# EAGLE board BRAIN2_Breakout_SW (EAGLE 6.6.0)
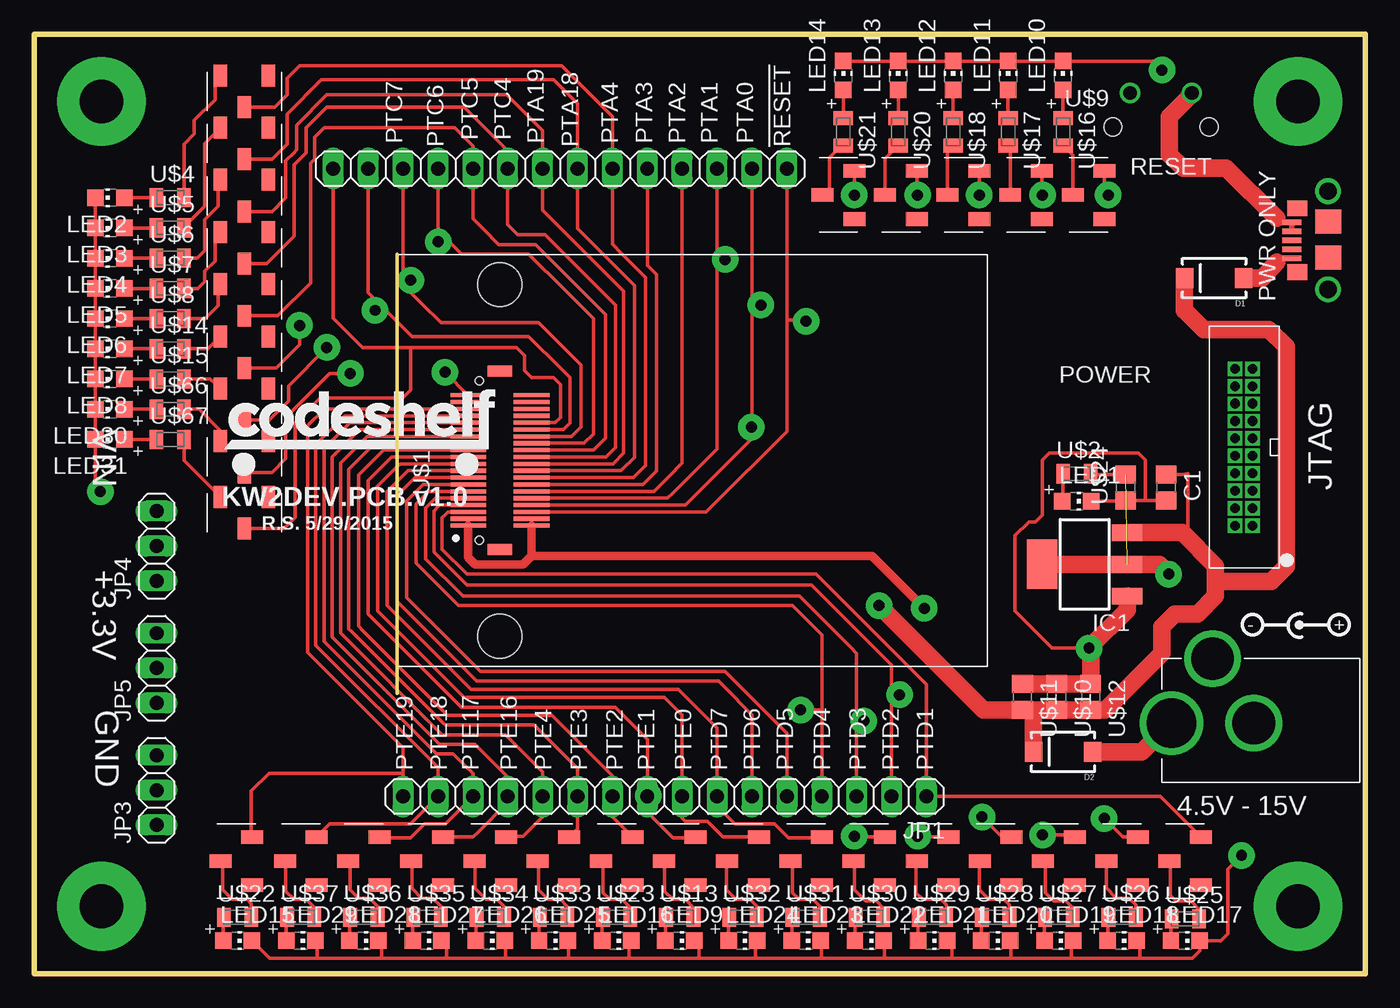
[diagram p0: board, top side]
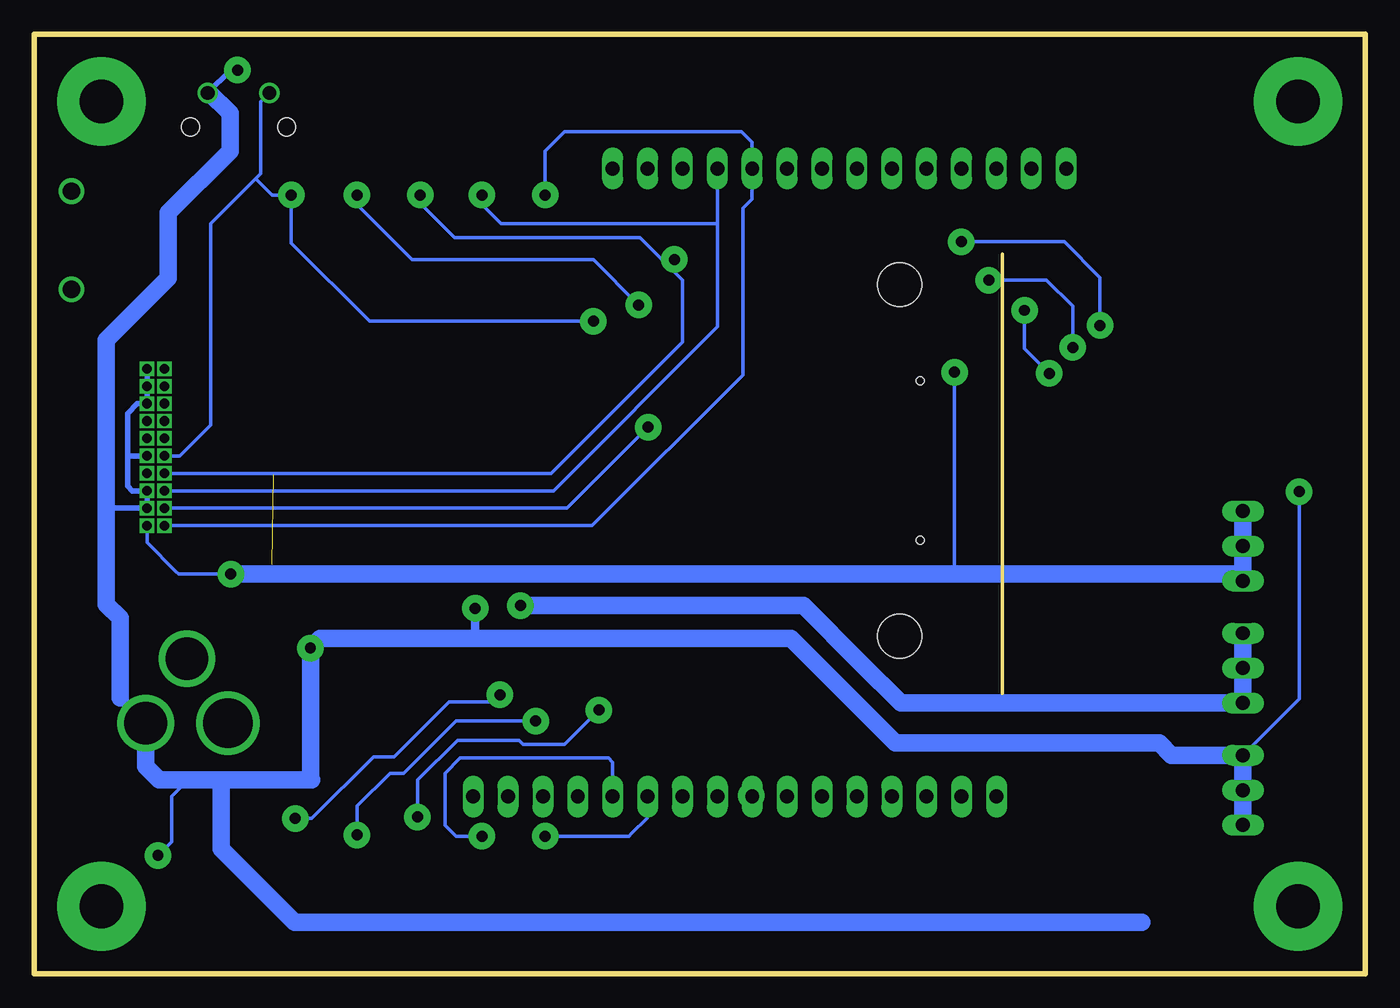
[diagram p1: board, bottom side, seen from below]

Size 96.9 x 68.4 mm. Coordinates in mm from the lower left corner, seen from the top.
Outline: 0,68.4 96.9,68.4 96.9,0 0,0 0,68.4
Copper layers (1*16): Top 0.035mm / dielectric 1.5mm / Bottom 0.035mm
Design rules "default *": minimum track width 10mil, minimum drill 0.8mm, track to track 0.25mm, track to pad 0.25mm, pad to pad 0.25mm, via to via 0.25mm, smd to smd 0.25mm, copper to edge 0.1mm, drill to drill 0.1mm, minimum pad ring 0.1mm, minimum via ring 0.55mm, stop-mask expansion 4mil, vias tented up to drill 0.8mm, thermal gap 10mil

## Footprints (pad centres in the part's own frame; a part is rotated, then mirrored left to right if it is on the bottom)
C0805 = smd 1.3 x 1.5: 1 -0.95,0; 2 0.95,0
SMA-DIODE = smd 1.27 x 1.47: A -2.15,0; C 2.15,0
SOT223 = smd 1.219 x 2.235: 1 -2.311,-3.099; 2 0,-3.099; 3 2.311,-3.099 | smd 3.6 x 2.2: 4 0,3.099
LQFP64 = smd 0.2 x 1: 1 -3.75,-5.75; 2 -3.25,-5.75; 3 -2.75,-5.75; 4 -2.25,-5.75; 5 -1.75,-5.75; 6 -1.25,-5.75; 7 -0.75,-5.75; 8 -0.25,-5.75; 9 0.25,-5.75; 10 0.75,-5.75; 11 1.25,-5.75; 12 1.75,-5.75; 13 2.25,-5.75; 14 2.75,-5.75; 15 3.25,-5.75; 16 3.75,-5.75; 33 3.75,5.75; 34 3.25,5.75; 35 2.75,5.75; 36 2.25,5.75; 37 1.75,5.75; 38 1.25,5.75; 39 0.75,5.75; 40 0.25,5.75; 41 -0.25,5.75; 42 -0.75,5.75; 43 -1.25,5.75; 44 -1.75,5.75; 45 -2.25,5.75; 46 -2.75,5.75; 47 -3.25,5.75; 48 -3.75,5.75 | smd 1 x 0.2: 17 5.75,-3.75; 18 5.75,-3.25; 19 5.75,-2.75; 20 5.75,-2.25; 21 5.75,-1.75; 22 5.75,-1.25; 23 5.75,-0.75; 24 5.75,-0.25; 25 5.75,0.25; 26 5.75,0.75; 27 5.75,1.25; 28 5.75,1.75; 29 5.75,2.25; 30 5.75,2.75; 31 5.75,3.25; 32 5.75,3.75; 49 -5.75,3.75; 50 -5.75,3.25; 51 -5.75,2.75; 52 -5.75,2.25; 53 -5.75,1.75; 54 -5.75,1.25; 55 -5.75,0.75; 56 -5.75,0.25; 57 -5.75,-0.25; 58 -5.75,-0.75; 59 -5.75,-1.25; 60 -5.75,-1.75; 61 -5.75,-2.25; 62 -5.75,-2.75; 63 -5.75,-3.25; 64 -5.75,-3.75
1X16 = drill 1.016 long: 1 -19.05,0; 2 -16.51,0; 3 -13.97,0; 4 -11.43,0; 5 -8.89,0; 6 -6.35,0; 7 -3.81,0; 8 -1.27,0; 9 1.27,0; 10 3.81,0; 11 6.35,0; 12 8.89,0; 13 11.43,0; 14 13.97,0; 15 16.51,0; 16 19.05,0
1X14 = drill 1.016 long: 1 -16.51,0; 2 -13.97,0; 3 -11.43,0; 4 -8.89,0; 5 -6.35,0; 6 -3.81,0; 7 -1.27,0; 8 1.27,0; 9 3.81,0; 10 6.35,0; 11 8.89,0; 12 11.43,0; 13 13.97,0; 14 16.51,0
1X03 = drill 1.016 long: 1 -2.54,0; 2 0,0; 3 2.54,0
CHIP-LED0805 = smd 1.2 x 1.2: A 0,-1.05; C 0,1.05
BRAIN_NEW = smd 0.3 x 2.6: P$1 -4.75,2.3; P$2 -4.75,-2.3; P$3 -4.25,2.3; P$4 -4.25,-2.3; P$5 -3.75,2.3; P$6 -3.75,-2.3; P$7 -3.25,2.3; P$8 -3.25,-2.3; P$9 -2.75,2.3; P$10 -2.75,-2.3; P$11 -2.25,2.3; P$12 -2.25,-2.3; P$13 -1.75,2.3; P$14 -1.75,-2.3; P$15 -1.25,2.3; P$16 -1.25,-2.3; P$17 -0.75,2.3; P$18 -0.75,-2.3; P$19 -0.25,2.3; P$20 -0.25,-2.3; P$21 0.25,2.3; P$22 0.25,-2.3; P$23 0.75,2.3; P$24 0.75,-2.3; P$25 1.25,2.3; P$26 1.25,-2.3; P$27 1.75,2.3; P$28 1.75,-2.3; P$29 2.25,2.3; P$30 2.25,-2.3; P$31 2.75,2.3; P$32 2.75,-2.3; P$33 3.25,2.3; P$34 3.25,-2.3; P$35 3.75,2.3; P$36 3.75,-2.3; P$37 4.25,2.3; P$38 4.25,-2.3; P$39 4.75,2.3; P$40 4.75,-2.3 | smd 0.8 x 1.8: P$41 -6.5,0; P$42 6.5,0 | hole 0.6: -5.8,1.5; 5.8,1.5 | hole 3.2: -12.8,0; 12.8,0
RF-C0805 = smd 1 x 1.4: 1 -1,0; 2 1,0
BARREL_CUI_PJ-002A = drill 3.6: P$1 0,0 | drill 3.1: P$2 6,0; P$3 3,4.7
RA_BUTTON = drill 0.99: P$1 -2.25,0; P$2 2.25,0 | hole 1.3: -3.501,2.49; 3.501,2.49
2X10JTAG = drill 0.7 pad 1 square: P$1 -6.35,-1.27; P$2 -6.35,0; P$3 -5.08,-1.27; P$4 -5.08,0; P$5 -3.81,-1.27; P$6 -3.81,0; P$7 -2.54,-1.27; P$8 -2.54,0; P$9 -1.27,-1.27; P$10 -1.27,0; P$11 0,-1.27; P$12 0,0; P$13 1.27,-1.27; P$14 1.27,0; P$15 2.54,-1.27; P$16 2.54,0; P$17 3.81,-1.27; P$18 3.81,0; P$19 5.08,-1.27; P$20 5.08,0
CJS = smd 1 x 1.6: P$1 0,1.15; P$2 -1.75,-1.15; P$3 1.75,-1.15
USB3076-30-A = smd 0.4 x 1.4: D+ 0,0; D- -0.65,0; GND 1.3,0; P$4 0.65,0; VCC -1.3,0 | smd 1.15 x 1.45: P$6 -2.32,-0.42; P$7 2.32,-0.42 | drill 1.25: P$8 -3.575,-2.65; P$9 3.575,-2.65 | smd 1.75 x 1.9: P$10 -1.25,-2.65; P$11 1.35,-2.65

## Placement (x,y rotation side)
C1  [C0805]  82.4,35.4 270 top
D1  [SMA-DIODE]  85.9,50.65 180 top
D2  [SMA-DIODE]  74.9,16.15 180 top
IC1  [SOT223]  76.47,29.8 90 top
IC2  FT2232HL  [LQFP64]  40.4,-18.6 0 top  (outside the outline)
JP1  [1X16]  45.9,12.9 180 top
JP2  [1X14]  38.28,58.62 0 top
JP3  [1X03]  8.9,13.36 90 top
JP4  [1X03]  8.9,31.14 90 top
JP5  [1X03]  8.9,22.25 90 top
LED1  [CHIP-LED0805]  75.9,34.4 270 top
LED2  [CHIP-LED0805]  5.5,56.5 90 top
LED3  [CHIP-LED0805]  5.5,54.3 90 top
LED4  [CHIP-LED0805]  5.5,52.1 90 top
LED5  [CHIP-LED0805]  5.5,49.9 90 top
LED6  [CHIP-LED0805]  5.5,47.7 90 top
LED7  [CHIP-LED0805]  5.5,45.5 90 top
LED8  [CHIP-LED0805]  5.5,43.3 90 top
LED9  [CHIP-LED0805]  47,2.4 270 top
LED10  [CHIP-LED0805]  74.9,65.4 0 top
LED11  [CHIP-LED0805]  70.9,65.4 0 top
LED12  [CHIP-LED0805]  66.9,65.4 0 top
LED13  [CHIP-LED0805]  62.9,65.4 0 top
LED14  [CHIP-LED0805]  58.9,65.4 0 top
LED15  [CHIP-LED0805]  14.8,2.4 270 top
LED16  [CHIP-LED0805]  42.4,2.4 270 top
LED17  [CHIP-LED0805]  83.8,2.4 270 top
LED18  [CHIP-LED0805]  79.2,2.4 270 top
LED19  [CHIP-LED0805]  74.6,2.4 270 top
LED20  [CHIP-LED0805]  70,2.4 270 top
LED21  [CHIP-LED0805]  65.4,2.4 270 top
LED22  [CHIP-LED0805]  60.8,2.4 270 top
LED23  [CHIP-LED0805]  56.2,2.4 270 top
LED24  [CHIP-LED0805]  51.6,2.4 270 top
LED25  [CHIP-LED0805]  37.8,2.4 270 top
LED26  [CHIP-LED0805]  33.2,2.4 270 top
LED27  [CHIP-LED0805]  28.6,2.4 270 top
LED28  [CHIP-LED0805]  24,2.4 270 top
LED29  [CHIP-LED0805]  19.4,2.4 270 top
LED30  [CHIP-LED0805]  5.5,41.1 90 top
LED31  [CHIP-LED0805]  5.5,38.9 90 top
U$1  KW2_CPU_NEW  [BRAIN_NEW]  33.9,37.37 90 top
U$2  1k  [RF-C0805]  75.9,36.4 0 top
U$3  BARREL_CUI_PJ-002A  [BARREL_CUI_PJ-002A]  82.79,18.23 0 top
U$4  [RF-C0805]  9.9,56.5 0 top
U$5  [RF-C0805]  9.9,54.3 0 top
U$6  [RF-C0805]  9.9,52.1 0 top
U$7  [RF-C0805]  9.9,49.9 0 top
U$8  [RF-C0805]  9.9,47.7 0 top
U$9  RA_BUTTON  [RA_BUTTON]  82.03,64.14 180 top
U$10  [C0805]  74.43,20.15 270 top
U$11  [C0805]  71.94,20.15 270 top
U$12  [C0805]  76.92,20.15 270 top
U$13  [RF-C0805]  47,4.1 0 top
U$14  [RF-C0805]  9.9,45.5 0 top
U$15  [RF-C0805]  9.9,43.3 0 top
U$16  [RF-C0805]  74.9,61.3 270 top
U$17  [RF-C0805]  70.9,61.3 270 top
U$18  [RF-C0805]  66.9,61.3 270 top
U$19  2X10JTAG  [2X10JTAG]  87.43,38.97 90 top
U$20  [RF-C0805]  62.9,61.3 270 top
U$21  2k  [RF-C0805]  58.9,61.3 270 top
U$22  [RF-C0805]  14.8,4.1 0 top
U$23  [RF-C0805]  42.4,4.1 0 top
U$24  [C0805]  79.46,35.4 90 top
U$25  [RF-C0805]  83.8,4 0 top
U$26  [RF-C0805]  79.2,4.1 0 top
U$27  [RF-C0805]  74.6,4.1 0 top
U$28  [RF-C0805]  70,4.1 0 top
U$29  [RF-C0805]  65.4,4.1 0 top
U$30  [RF-C0805]  60.8,4.1 0 top
U$31  [RF-C0805]  56.2,4.1 0 top
U$32  [RF-C0805]  51.6,4.1 0 top
U$33  [RF-C0805]  37.8,4.1 0 top
U$34  [RF-C0805]  33.2,4.1 0 top
U$35  [RF-C0805]  28.6,4.1 0 top
U$36  [RF-C0805]  24,4.1 0 top
U$37  [RF-C0805]  19.4,4.1 0 top
U$38  CJS  [CJS]  83.8,8.2 90 top
U$39  CJS  [CJS]  79.2,8.2 90 top
U$40  CJS  [CJS]  74.6,8.2 90 top
U$41  CJS  [CJS]  70,8.2 90 top
U$42  CJS  [CJS]  65.4,8.2 90 top
U$43  CJS  [CJS]  56.2,8.2 90 top
U$44  CJS  [CJS]  47,8.2 90 top
U$45  CJS  [CJS]  14.7,8.2 90 top
U$46  CJS  [CJS]  19.4,8.2 90 top
U$47  CJS  [CJS]  24,8.2 90 top
U$48  CJS  [CJS]  28.6,8.2 90 top
U$49  CJS  [CJS]  33.2,8.2 90 top
U$50  CJS  [CJS]  37.8,8.2 90 top
U$51  CJS  [CJS]  42.4,8.2 90 top
U$52  CJS  [CJS]  51.6,8.2 90 top
U$53  CJS  [CJS]  60.8,8.2 90 top
U$54  CJS  [CJS]  76.75,56.7 90 top
U$55  CJS  [CJS]  72.2,56.7 90 top
U$56  CJS  [CJS]  67.65,56.7 90 top
U$57  CJS  [CJS]  63.1,56.7 90 top
U$58  CJS  [CJS]  58.55,56.7 90 top
U$59  CJS  [CJS]  15.3,64.25 180 top
U$60  CJS  [CJS]  15.3,60.45 180 top
U$61  CJS  [CJS]  15.3,56.65 180 top
U$62  CJS  [CJS]  15.3,52.85 180 top
U$63  CJS  [CJS]  15.3,49.05 180 top
U$64  CJS  [CJS]  15.3,45.25 180 top
U$65  CJS  [CJS]  15.3,41.45 180 top
U$66  [RF-C0805]  9.9,41.1 0 top
U$67  [RF-C0805]  9.9,38.9 0 top
U$68  CJS  [CJS]  15.3,37.65 180 top
U$69  CJS  [CJS]  15.3,33.55 180 top
X1  USB  [USB3076-30-A]  91.55,53.4 90 top

## Library data of the parts
C1 U$12 U$24 = GW-devices; MFGN: Murata; MFGP: GRM219R61E106KA12D
D1 D2 = SparkFun; MFGN: Diodes Inc; MFGP: SBRT3U45SA-13
IC1 = KW2; MFGN: OnSemi; MFGP: NCP1117ST33T3G
IC2 = KW2
JP1 = pinhead; MFGN: Sullins Connector; MFGP: PRPC016SAAN-RC
JP2 = pinhead; MFGN: Sullins Connector; MFGP: PRPC012SAAN-RC
JP3-JP5 = pinhead; MFGN: Sullins Connector; MFGP: PRPC003SAAN-RC
LED1 = adafruit; MFGN: Wurth Electronics Inc; MFGP: 150080BS75000
LED2-LED31 = adafruit; MFGN: Kingbright; MFGP: APT2012SECK
U$1 = KW2; MFGN: Hirose; MFGP: DF12(3.0)-40DP-0.5V(86)
U$2 = GW-devices; MFGN: Panasonic; MFGP: ERJ-6ENF2000V
U$3 = KW2; MFGN: CUI; MFGP: PJ002-A
U$4-U$8 U$13-U$18 U$20-U$23 U$25-U$37 U$66 U$67 = GW-devices; MFGN: Panasonic; MFGP: ERJ-6ENF2001V
U$9 = KW2; MFGN: TE; MFGP: 1825027-5
U$10 = GW-devices; MFGN: TDK; MFGP: C2012X5R1H104K085AA
U$11 = GW-devices; MFGN: TDK; MFGP: C2012X5R1E105K125AA
U$19 = KW2; MFGN: CNC Tech; MFGP: 3220-20-0100-00
U$38-U$65 U$68 U$69 = KW2; MFGN: Copal Electronics Inc; MFGP: CJS-1200TA
X1 = SparkFun; MFGN: GLOBAL CONNECTOR TECHNOLOGY; MFGP: USB3076-30-A

## Nets
+3V3: IC1.2 IC1.4 JP4.1 JP4.2 JP4.3 U$1.P$37 U$1.P$39 U$2.2 U$19.P$1 U$24.2
GND: C1.2 IC1.1 JP3.1 JP3.2 JP3.3 LED1.C LED2.C LED3.C LED4.C LED5.C LED6.C LED7.C LED8.C LED9.C LED10.C LED11.C LED12.C LED13.C LED14.C LED15.C LED16.C LED17.C LED18.C LED19.C LED20.C LED21.C LED22.C LED23.C LED24.C LED25.C LED26.C LED27.C LED28.C LED29.C LED30.C LED31.C U$1.P$1 U$1.P$2 U$1.P$3 U$1.P$4 U$3.P$2 U$9.P$1 U$10.1 U$11.1 U$12.1 U$19.P$3 U$19.P$5 U$19.P$9 U$19.P$15 U$19.P$17 U$19.P$19 U$24.1 X1.GND X1.P$4
N$1: LED1.A U$2.1
N$2: LED2.A U$4.1
N$3: LED3.A U$5.1
N$4: LED4.A U$6.1
N$5: LED8.A U$15.1
N$6: LED5.A U$7.1
N$7: LED6.A U$8.1
N$8: LED7.A U$14.1
N$9: LED9.A U$13.1
N$10: U$13.2 U$44.P$1
N$11: U$15.2 U$65.P$3
N$12: U$14.2 U$64.P$3
N$13: U$8.2 U$63.P$3
N$14: U$7.2 U$62.P$3
N$15: U$6.2 U$61.P$3
N$16: U$5.2 U$60.P$3
N$17: U$4.2 U$59.P$3
N$18: U$25.2 U$38.P$1
N$19: U$26.2 U$39.P$1
N$20: U$27.2 U$40.P$1
N$21: JP2.3 U$1.P$28 U$65.P$1
N$22: JP2.4 U$1.P$26 U$64.P$1
N$23: JP2.5 U$1.P$24 U$63.P$1
N$24: JP2.6 U$1.P$22 U$62.P$1
N$25: JP2.7 U$1.P$20 U$61.P$1
N$26: JP2.8 U$1.P$18 U$60.P$1
N$27: JP2.9 U$1.P$16 U$59.P$1
N$28: LED15.A U$22.1
N$29: LED17.A U$25.1
N$30: LED18.A U$26.1
N$31: LED19.A U$27.1
N$32: LED20.A U$28.1
N$33: LED16.A U$23.1
N$34: LED25.A U$33.1
N$35: LED26.A U$34.1
N$36: LED27.A U$35.1
N$37: LED21.A U$29.1
N$38: LED22.A U$30.1
N$39: LED23.A U$31.1
N$40: LED24.A U$32.1
N$41: U$28.2 U$41.P$1
N$42: U$29.2 U$42.P$1
N$43: U$31.2 U$43.P$1
N$44: U$37.2 U$46.P$1
N$45: U$36.2 U$47.P$1
N$46: LED28.A U$36.1
N$48: JP2.10 U$1.P$14 U$19.P$2 U$58.P$3
N$49: LED10.A U$16.1
N$50: U$16.2 U$54.P$1
N$52: LED11.A U$17.1
N$53: U$17.2 U$55.P$1
N$54: JP2.12 U$1.P$10 U$19.P$8 U$56.P$3
N$55: LED12.A U$18.1
N$56: U$18.2 U$56.P$1
N$57: JP2.13 U$1.P$8 U$19.P$4 U$55.P$3
N$58: LED13.A U$20.1
N$59: U$20.2 U$57.P$1
N$60: JP2.14 U$1.P$6 U$9.P$2 U$19.P$10 U$54.P$3
N$61: LED14.A U$21.1
N$62: U$21.2 U$58.P$1
N$63: LED29.A U$37.1
N$64: U$22.2 U$45.P$1
N$65: U$35.2 U$48.P$1
N$66: U$34.2 U$49.P$1
N$67: U$33.2 U$50.P$1
N$68: U$23.2 U$51.P$1
N$69: U$32.2 U$52.P$1
N$70: U$30.2 U$53.P$1
N$71: D2.A U$3.P$1
N$72: D1.A X1.VCC
N$73: JP2.1 U$1.P$32 U$69.P$1
N$75: LED30.A U$66.1
N$76: LED31.A U$67.1
N$77: U$67.2 U$69.P$3
N$78: U$66.2 U$68.P$3
N$80: JP2.2 U$1.P$30 U$68.P$1
N$82: X1.D-
N$83: X1.D+
N$86: JP2.11 U$1.P$12 U$19.P$6 U$57.P$3
PTD1: JP1.1 U$1.P$5 U$38.P$3
PTD2: JP1.2 U$1.P$7 U$39.P$3
PTD3: JP1.3 U$1.P$9 U$40.P$3
PTD4: JP1.4 U$1.P$11 U$41.P$3
PTD5: JP1.5 U$1.P$13 U$42.P$3
PTD6: JP1.6 U$1.P$15 U$53.P$3
PTD7: JP1.7 U$1.P$17 U$43.P$3
PTE0: JP1.8 U$1.P$19 U$52.P$3
PTE1: JP1.9 U$1.P$21 U$44.P$3
PTE2: JP1.10 U$1.P$23 U$51.P$3
PTE3: JP1.11 U$1.P$25 U$50.P$3
PTE4: JP1.12 U$1.P$27 U$49.P$3
PTE16: JP1.13 U$1.P$29 U$48.P$3
PTE17: JP1.14 U$1.P$31 U$47.P$3
PTE18: JP1.15 U$1.P$33 U$46.P$3
PTE19: JP1.16 U$1.P$35 U$45.P$3
V+: C1.1 D1.C D2.C IC1.3 JP5.1 JP5.2 JP5.3 U$10.2 U$11.2 U$12.2

## Tracks (layer width: path | path; a pad name or v marks a point on that pad's centre or on a via)
+3V3  (via drill 0.8 pad 1.93)  (1 unrouted)
  Top 0.254: U$1.P$39 U$1.P$37 31.6,42.1 v29.9,43.8 | 79.4,36.41 U$24.2 76.95,36.35 U$2.2
  Top 1.27: IC1.4 75.9,29.8 IC1.2 81.9,29.8 v82.6,29.1
  Bottom 0.254: v29.9,43.8 29.9,29.4 29.6,29.1 | U$19.P$1 88.7,31.4 86.6,29.3 86.4,29.1 v82.6,29.1
  Bottom 1.27: v82.6,29.1 43.2,29.1 29.6,29.1 9.4,29.1 8.9,29.1 | JP4.3 JP4.2 8.9,29.1 | 8.9,29.1 JP4.1
GND  (via drill 0.8, 0.8 pad 1.93)
  Top 0.254: 80.9,34.45 U$24.1 79.41,34.4 LED1.C | 80.9,34.45 81,34.45 C1.2 | 76.92,23.58 v76.8,23.7 74.1,23.7 71.4,26.4 71.4,31.9 72.4,32.9 72.9,32.9 73.4,33.4 73.4,37.4 73.9,37.9 80.4,37.9 80.9,37.4 80.9,34.45 | LED14.C LED13.C LED12.C LED11.C LED10.C 77.95,66.45 81.45,66.45 v82.1,65.8 | LED2.C LED3.C LED4.C LED5.C LED6.C LED7.C LED8.C LED30.C LED31.C 4.45,35.45 v4.8,35.1 | LED15.C 17.15,1.1 20.6,1.1 | 20.6,1.1 25.3,1.1 | 25.3,1.1 30,1.1 | 30,1.1 34.3,1.1 | 34.3,1.1 38.9,1.1 | 38.9,1.1 43.3,1.1 | 43.3,1.1 48.4,1.1 | 48.4,1.1 52.5,1.1 | 52.5,1.1 57.3,1.1 | 57.3,1.1 61.9,1.1 | 61.9,1.1 66.8,1.1 | 66.8,1.1 71.1,1.1 | 71.1,1.1 75.5,1.1 | 75.5,1.1 80.5,1.1 | 80.5,1.1 84.3,1.1 84.85,1.65 LED17.C 86.4,2.4 86.9,2.9 86.9,7.6 v87.9,8.6 | LED18.C 80.5,2.15 80.5,1.1 | LED19.C 75.5,2.25 75.5,1.1 | LED20.C 71.1,2.35 71.1,1.1 | LED21.C 66.8,2.05 66.8,1.1 | LED22.C 61.9,2.35 61.9,1.1 | LED23.C 57.3,2.35 57.3,1.1 | LED24.C 52.5,2.25 52.5,1.1 | LED9.C 48.4,2.05 48.4,1.1 | LED16.C 43.3,2.25 43.3,1.1 | LED25.C 38.9,2.35 38.9,1.1 | LED26.C 34.3,2.35 34.3,1.1 | LED29.C 20.6,2.25 20.6,1.1 | LED28.C 25.3,2.15 25.3,1.1 | LED27.C 30,2.05 30,1.1 | X1.GND 90.85,54.7 90.45,55 | U$1.P$4 U$1.P$2 | U$1.P$3 U$1.P$1
  Top 0.406: X1.GND X1.P$4
  Top 0.61: U$1.P$2 36.2,30.4 | 36.2,30.4 35.6,29.8 32.1,29.8 31.6,30.3 U$1.P$1 | 36.2,30.4 61,30.4 v64.8,26.6
  Top 1.27: IC1.1 79.57,26.47 v76.8,23.7 | U$11.1 U$10.1 U$12.1 76.92,23.58 | U$9.P$1 84.28,64.03 82.65,62.4 82.65,59.65 83.65,58.65 86.8,58.65 90.45,55
  Bottom 0.254: 85.2,13.9 85.4,14.1 | U$19.P$15 | 85.7,14.1 86.9,12.9 86.9,9.6 v87.9,8.6 | U$9.P$1 84.2,64.22 | v4.8,35.1 4.8,20 JP3.3 | 64.8,24.5 64.9,24.4
  Bottom 0.406: 90.65,20.09 U$3.P$2 | U$19.P$9 90,37.7 90.1,37.6 | 90.1,37.6 90.1,35.5 89.76,35.16 U$19.P$5 U$19.P$3 89.86,33.89 91.65,33.89 91.65,33.9 | 90.1,37.6 90.1,40.8 89.4,41.5 U$19.P$15 | U$19.P$19 U$19.P$17 U$19.P$15 | v82.1,65.8 82.62,65.8 U$9.P$1
  Bottom 0.61: v64.8,26.6 64.8,24.5
  Bottom 1.27: 16.25,3.75 68.75,3.75 77.95,3.75 83.3,9.1 83.3,13.8 83,14.1 | U$3.P$2 88.79,15.09 87.8,14.1 85.7,14.1 85.4,14.1 83,14.1 | 83,14.1 76.7,14.1 76.8,14.2 v76.8,23.7 76.1,24.4 64.9,24.4 41.8,24.4 34.2,16.8 15,16.8 14.1,15.9 JP3.3 JP3.2 JP3.1 | 90.65,20.09 90.65,25.9 91.65,26.9 91.65,33.9 91.65,46.15 90.78,47.02 | 90.78,47.02 90.65,47.15 | 84.2,64.22 84.2,64.2 82.65,62.65 82.65,59.9 87.15,55.4 87.15,50.65 90.78,47.02
N$1
  Top 0.254: U$2.1 74.9,34.45 LED1.A
N$2
  Top 0.254: LED2.A U$4.1
N$3
  Top 0.254: LED3.A U$5.1
N$4
  Top 0.254: LED4.A U$6.1
N$5
  Top 0.254: LED8.A U$15.1
N$6
  Top 0.254: LED5.A U$7.1
N$7
  Top 0.254: LED6.A U$8.1
N$8
  Top 0.254: LED7.A U$14.1
N$9
  Top 0.254: U$13.1 45.95,4.05 LED9.A
N$10
  Top 0.254: U$13.2 48,4.8 47.4,5.4 46.5,5.4 45.9,6 45.9,7.85 45.85,7.9 U$44.P$1
N$11
  Top 0.254: U$15.2 12.8,43.3 U$65.P$3
N$12
  Top 0.254: U$14.2 12.65,45.5 U$64.P$3
N$13
  Top 0.254: U$8.2 12.45,47.7 13.4,48.65 13.4,50.05 U$63.P$3
N$14
  Top 0.254: U$7.2 11.9,49.9 12.4,50.4 12.4,51.15 13.15,51.9 13.15,53.6 U$62.P$3
N$15
  Top 0.254: U$6.2 11.85,52.1 12.4,52.65 12.4,54.9 12.9,55.4 13.4,55.9 13.4,57.65 U$61.P$3
N$16
  Top 0.254: U$5.2 10.9,54.4 12.4,55.9 12.4,60.45 U$60.P$3
N$17
  Top 0.254: U$4.2 10.9,60.4 11.65,61.15 11.65,62.15 13.15,63.65 13.15,65 U$59.P$3
N$18
  Top 0.254: U$25.2 84.8,4.7 84.2,5.3 83.1,5.3 82.7,5.7 82.7,7.85 82.65,7.9 U$38.P$1
N$19
  Top 0.254: U$39.P$1 78.05,6.25 78.8,5.5 79.7,5.5 80.2,5 U$26.2
N$20
  Top 0.254: U$27.2 75.6,4.8 75.1,5.3 74.2,5.3 73.6,5.9 73.6,8 73.45,8.15 U$40.P$1
N$21  (via drill 0.8 pad 1.93)
  Top 0.254: U$1.P$28 39.12,39.12 39.8,39.8 39.8,44.3 36.7,47.4 29.6,47.4 28.2,48.8 26.85,50.15 26.85,50.5 | 26.85,50.5 JP2.3 | U$65.P$1 17.1,40.3 18.5,41.7 18.5,42.8 v21.3,45.6 | v27.4,50.5 26.85,50.5
  Bottom 0.254: v21.3,45.6 21.3,48.6 23.2,50.5 v27.4,50.5
N$22  (via drill 0.8 pad 1.93)
  Top 0.254: JP2.4 29.39,54.11 30.15,53.35 | 30.15,53.35 31.1,52.4 36,52.4 38.6,49.8 40.7,47.7 40.7,39.3 40.02,38.62 U$1.P$26 | U$64.P$1 17.6,44.1 19.3,45.8 v19.3,47.2 | v29.4,53.3 30.1,53.3 30.15,53.35
  Bottom 0.254: v19.3,47.2 19.3,50.7 21.9,53.3 v29.4,53.3
N$23
  Top 0.254: U$1.P$24 40.72,38.12 41.6,39 41.6,48 36.5,53.1 33.8,53.1 32.7,54.2 31.93,54.97 JP2.5 31.93,60.27 31.3,60.9 30.6,61.6 21.1,61.6 20.4,60.9 20.4,59.3 20.1,59 20.1,50.3 17.7,47.9 U$63.P$1
N$24
  Top 0.254: U$1.P$22 41.62,37.62 41.8,37.8 42.3,38.3 42.3,48.7 37.2,53.8 35.2,53.8 34.47,54.53 JP2.6 34.47,59.93 31.3,63.1 21.3,63.1 19.8,61.6 19.8,59.8 19.7,59.7 18.9,58.9 18.9,53.7 16.9,51.7 U$62.P$1
N$25
  Top 0.254: U$1.P$20 42.12,37.12 42.9,37.9 42.9,49.7 37.4,55.2 37.01,55.59 JP2.7 37.01,61.39 34.4,64 21.3,64 19.1,61.8 19.1,60 18.9,59.8 18.3,59.2 18.3,56.5 17.3,55.5 U$61.P$1
N$26
  Top 0.254: U$1.P$18 42.72,36.62 42.8,36.7 43.7,37.6 43.7,50.1 39.55,54.25 JP2.8 39.55,63.35 37.8,65.1 20.9,65.1 18.4,62.6 18.4,60.4 17.9,59.9 17.3,59.3 U$60.P$1
N$27
  Top 0.254: U$1.P$16 43.62,36.12 44.5,37 44.5,50.7 42.8,52.4 42.09,53.11 JP2.9 42.09,62.41 41.6,62.9 38.4,66.1 19.3,66.1 18.4,65.2 18.4,64 17.5,63.1 U$59.P$1
N$28
  Top 0.254: U$22.1 13.75,4.05 LED15.A
N$29
  Top 0.254: U$25.1 82.75,3.95 LED17.A
N$30
  Top 0.254: U$26.1 78.15,4.05 LED18.A
N$31
  Top 0.254: U$27.1 73.55,4.05 LED19.A
N$32
  Top 0.254: U$28.1 68.95,4.05 LED20.A
N$33
  Top 0.254: U$23.1 41.35,4.05 LED16.A
N$34
  Top 0.254: U$33.1 36.75,4.05 LED25.A
N$35
  Top 0.254: U$34.1 32.15,4.05 LED26.A
N$36
  Top 0.254: U$35.1 27.55,4.05 LED27.A
N$37
  Top 0.254: U$29.1 64.35,4.05 LED21.A
N$38
  Top 0.254: U$30.1 59.75,4.05 LED22.A
N$39
  Top 0.254: U$31.1 55.15,4.05 LED23.A
N$40
  Top 0.254: U$32.1 50.55,4.05 LED24.A
N$41
  Top 0.254: U$28.2 71,5 70.6,5.4 69.5,5.4 68.8,6.1 68.8,7.85 68.85,7.9 U$41.P$1
N$42
  Top 0.254: U$29.2 66.4,5 66,5.4 64.7,5.4 64.2,5.9 64.2,7.85 64.25,7.9 U$42.P$1
N$43
  Top 0.254: U$31.2 57.2,4.9 56.7,5.4 55.7,5.4 55.2,5.9 55.2,8 55.05,8.15 U$43.P$1
N$44
  Top 0.254: U$37.2 20.4,4.8 19.8,5.4 18.9,5.4 18.3,6 18.3,7.85 18.25,7.9 U$46.P$1
N$45
  Top 0.254: U$36.2 25,4.9 24.4,5.5 23.6,5.5 23,6.1 23,8 22.85,8.15 U$47.P$1
N$46
  Top 0.254: U$36.1 22.95,4.05 LED28.A
N$47  (via drill 3.17 pad 6.45)
  other vias: 4.9,63.5
N$48  (via drill 0.8 pad 1.93)
  Top 0.254: JP2.10 44.63,51.57 45.3,50.9 45.3,36.6 44.4,35.7 44.32,35.62 U$1.P$14 | U$58.P$3 v59.7,56.7
  Bottom 0.254: v59.7,56.7 59.7,59.9 58.3,61.3 45.4,61.3 44.63,60.53 JP2.10 44.63,56.4 45.3,55.73 45.3,43.6 56.28,32.62 U$19.P$2
N$49
  Top 0.254: LED10.A U$16.1
N$50
  Top 0.254: U$54.P$1 75.6,59.6 U$16.2
N$52
  Top 0.254: LED11.A U$17.1
N$53
  Top 0.254: U$55.P$1 71.05,60.15 U$17.2
N$54  (via drill 0.8 pad 1.93)
  Top 0.254: JP2.12 49.71,51 | 49.71,51 49.71,38.21 46.5,35 46.12,34.62 U$1.P$10 | U$56.P$3 v68.8,56.7 | 49.71,51 49.71,51.41 v50.3,52
  Bottom 0.254: v68.8,56.7 68.8,56.1 66.3,53.6 52.8,53.6 50.8,51.6 | 50.8,51.6 50.2,51 49.71,50.51 49.71,46 59.28,36.43 U$19.P$8 | v50.3,52 50.4,52 50.8,51.6
N$55
  Top 0.254: LED12.A U$18.1
N$56
  Top 0.254: U$56.P$1 66.5,59.9 U$18.2
N$57  (via drill 0.8 pad 1.93)
  Top 0.254: U$1.P$8 47.42,34.12 50.8,37.5 52.25,38.95 52.25,39.3 52.25,39.7 | 52.25,39.7 52.25,48.7 | 52.25,48.7 JP2.13 | U$55.P$3 73.35,56.75 v73.4,56.7 | v52.9,48.7 52.25,48.7 | v52.2,39.8 52.2,39.75 52.25,39.7
  Bottom 0.254: v73.4,56.7 73.4,56 69.4,52 56.2,52 v52.9,48.7 | U$19.P$4 58.31,33.89 58.11,33.89 v52.2,39.8
N$58
  Top 0.254: LED13.A U$20.1
N$59
  Top 0.254: U$57.P$1 61.95,59.35 U$20.2
N$60  (via drill 0.8 pad 1.93)
  Top 0.254: JP2.14 54.79,47.58 | 54.79,47.58 54.79,39.49 49.2,33.9 48.92,33.62 U$1.P$6 | U$54.P$3 77.9,57 v78.2,56.7 | 54.79,47.58 56.12,47.58 v56.2,47.5
  Bottom 0.254: U$19.P$10 86.3,37.7 84.05,39.95 84.05,54.61 83.33,55.33 82.96,55.7 80.78,57.88 | U$9.P$2 80.42,63.5 80.42,60.24 80.42,58.24 80.78,57.88 | 80.78,57.88 79.6,56.7 v78.2,56.7 78.2,53.2 72.5,47.5 v56.2,47.5
N$61
  Top 0.254: LED14.A U$21.1
N$62
  Top 0.254: U$21.2 58.8,60.3 57.9,59.4 57.9,57.2 U$58.P$1
N$63
  Top 0.254: U$37.1 18.35,4.05 LED29.A
N$64
  Top 0.254: U$22.2 15.8,5.1 15.5,5.4 14.4,5.4 13.7,6.1 13.7,8 13.55,8.15 U$45.P$1
N$65
  Top 0.254: U$35.2 29.6,4.9 29,5.5 28.2,5.5 27.5,6.2 27.5,8.1 27.45,8.15 U$48.P$1
N$66
  Top 0.254: U$34.2 34.2,4.9 33.7,5.4 32.9,5.4 32.1,6.2 32.1,7.85 32.05,7.9 U$49.P$1
N$67
  Top 0.254: U$33.2 38.8,4.9 38.3,5.4 37.4,5.4 36.7,6.1 36.7,8.1 36.65,8.15 U$50.P$1
N$68
  Top 0.254: U$23.2 43.4,4.8 42.8,5.4 41.9,5.4 41.4,5.9 41.4,8 41.4,8.05 U$51.P$1
N$69
  Top 0.254: U$32.2 52.6,4.9 52.1,5.4 51.1,5.4 50.4,6.1 50.4,7.85 50.45,7.9 U$52.P$1
N$70
  Top 0.254: U$30.2 61.8,4.8 61.3,5.3 60.5,5.3 59.7,6.1 59.7,7.85 59.65,7.9 U$53.P$1
N$71
  Top 1.27: U$3.P$1 82.73,18.23 80.65,16.15 D2.A
N$72
  Top 0.254: X1.VCC 90.8,52.15 90.45,51.8
  Top 1.27: D1.A 89.4,50.65 90.45,51.8
N$73
  Top 0.254: U$1.P$32 37.92,40.12 38.3,40.5 38.3,42.9 37.8,43.4 36.2,43.4 35.7,43.9 35.7,45 35.1,45.6 27.5,45.6 | 27.5,45.6 23.9,45.6 22.3,47.2 21.77,47.73 JP2.1 | U$69.P$1 18.2,32.4 19,33.2 19,40.1 20.8,41.9 26.8,41.9 27.4,42.5 27.4,45.5 27.5,45.6
N$74  (via drill 3.17 pad 6.45)
  other vias: 92,4.9
N$75
  Top 0.254: LED30.A U$66.1
N$76
  Top 0.254: LED31.A U$67.1
N$77
  Top 0.254: U$67.2 10.9,37.35 U$69.P$3
N$78
  Top 0.254: U$66.2 12,41.1 13.5,39.6 13.5,38.85 U$68.P$3
N$79  (via drill 3.17 pad 6.45)
  other vias: 92,63.5
N$80  (via drill 0.8 pad 1.93)
  Top 0.254: U$1.P$30 38.52,39.62 39,40.1 39,43.4 38.3,44.1 36,46.4 27.5,46.4 25.2,48.7 | 25.2,48.7 24.31,49.59 JP2.2 | U$68.P$1 17.3,36.5 18.3,37.5 18.3,40.5 20.8,43 21.5,43.7 v23,43.7 | v24.8,48.3 25.2,48.7
  Bottom 0.254: v23,43.7 24.8,45.5 v24.8,48.3
N$81  (via drill 3.17 pad 6.45)
  other vias: 4.9,4.9
N$86  (via drill 0.8 pad 1.93)
  Top 0.254: U$1.P$12 45.12,35.12 46.2,36.2 47.17,37.17 47.17,53.6 JP2.11 | U$57.P$3 64.25,56.75 v64.3,56.7
  Bottom 0.254: v64.3,56.7 64.3,56 62.9,54.6 48.8,54.6 47.47,54.6 47.17,54.6 | U$19.P$6 59.11,35.16 47.17,47.1 47.17,52.97 47.17,54.6 | 47.17,54.9 47.17,55.2 | 47.17,55.2 JP2.11 | 47.17,54.6 47.17,54.67 47.17,55.2
PTD1
  Top 0.254: U$1.P$5 30.12,33.62 29.9,33.4 29.7,33.2 29.7,30.9 31.5,29.1 56.9,29.1 64.3,21.7 64.95,21.05 JP1.1 82,12.9 U$38.P$3
PTD2  (via drill 0.8 pad 1.93)
  Top 0.254: JP1.2 62.41,20.3 | 62.41,20.3 62.41,22.49 56.6,28.3 31.5,28.3 29.1,30.7 29.1,33.7 29.4,34 29.52,34.12 U$1.P$7 | U$39.P$3 79.25,9.95 v77.9,11.3 | v63,20.3 62.41,20.3
  Bottom 0.254: v77.9,11.3 76.7,11.3 72.2,15.8 70.7,15.8 66.7,19.8 63.5,19.8 v63,20.3
PTD3  (via drill 0.8 pad 1.93)
  Top 0.254: U$1.P$9 29.22,34.62 28.5,33.9 28.5,30.2 31.2,27.5 55.7,27.5 59.5,23.7 59.87,23.33 59.87,18.47 | 59.87,18.47 JP1.3 | 59.87,18.47 59.94,18.4 v60.4,18.4 | U$40.P$3 75.7,9.9 75.5,10.1 v73.4,10.1
  Bottom 0.254: v60.4,18.4 66.2,18.4 70,14.6 71,14.6 73.4,12.2 v73.4,10.1
PTD4  (via drill 0.8 pad 1.93)
  Top 0.254: JP1.4 57.33,19 | 57.33,19 57.33,24.67 55.7,26.3 55.2,26.8 30.9,26.8 27.8,29.9 27.8,33.8 27.8,34.2 28.72,35.12 U$1.P$11 | U$41.P$3 70.45,9.95 v69,11.4 | v55.8,19.2 57.13,19.2 57.33,19
  Bottom 0.254: v69,11.4 69,14.1 66.1,17 61.6,17 61.3,16.7 58.3,16.7 v55.8,19.2
PTD5  (via drill 0.8 pad 1.93)
  Top 0.254: U$1.P$13 28.32,35.62 27.3,34.6 27.1,34.4 27.1,27.4 32.1,22.4 32.5,22 50.3,22 54.2,18.1 54.79,17.51 JP1.5 | U$42.P$3 64.35,9.95 v64.3,10
  Bottom 0.254: JP1.5 54.79,15.4 55.09,15.7 65.9,15.7 67,14.6 67,10.8 66.2,10 v64.3,10
PTD6  (via drill 0.8 pad 1.93)
  Top 0.254: JP1.6 52.25,18.85 50.2,20.9 49.8,21.3 32.2,21.3 26.4,27.1 26.4,34.8 27.72,36.12 U$1.P$15 | U$53.P$3 59.85,9.95 59.75,9.95 v59.7,10
  Bottom 0.254: JP1.6 52.3,12.85 52.3,11.3 53.4,10.2 53.6,10 v59.7,10
PTD7
  Top 0.254: U$1.P$17 27.22,36.62 25.7,35.1 25.7,26.8 31.8,20.7 46.9,20.7 49.2,18.4 49.71,17.89 JP1.7 49.71,12.19 51,10.9 53.9,10.9 54.9,9.9 57.3,9.9 U$43.P$3
PTE0
  Top 0.254: U$1.P$19 26.62,37.12 26.3,36.8 25,35.5 25,26.4 31.3,20.1 31.7,20.1 45.9,20.1 46.1,19.9 47.17,18.83 JP1.8 47.17,11.33 47.4,11.1 49,11.1 49.6,10.5 50.15,9.95 U$52.P$3
PTE1  (via drill 0.8 pad 1.93)
  Top 0.254: U$1.P$21 26.02,37.62 24.3,35.9 24.3,26.2 31.1,19.4 42.3,19.4 44.4,17.3 44.63,17.07 JP1.9 | v44.7,12.97 44.7,11.7 46.5,9.9 48.1,9.9 U$44.P$3
  Bottom 0.254: v44.7,12.97 JP1.9
PTE2
  Top 0.254: U$1.P$23 25.42,38.12 23.6,36.3 23.6,25.3 23.9,25 30.1,18.8 37.7,18.8 42.09,14.41 JP1.10 42.09,11.41 U$51.P$3
PTE3
  Top 0.254: U$1.P$25 25.4,38.62 24.8,38.62 22.9,36.72 22.9,36.12 22.9,25.1 23.1,24.9 29.9,18.1 36.4,18.1 39.55,14.95 JP1.11 39.55,10.55 U$50.P$3
PTE4
  Top 0.254: U$1.P$27 24.22,39.12 24,38.9 22.3,37.2 22.3,24.8 29.7,17.4 34.3,17.4 36.7,15 37.01,14.69 JP1.12 37.01,11.41 35.6,10 34.4,10 U$49.P$3
PTE16
  Top 0.254: U$1.P$29 23.7,39.62 21.7,37.62 21.7,24.5 21.8,24.4 29.5,16.7 32.1,16.7 34.47,14.33 JP1.13 34.47,12.47 32.3,10.3 31.95,9.95 U$48.P$3
PTE17
  Top 0.254: U$1.P$31 23,40.12 21.1,38.22 21.1,24.2 29.3,16 30.5,16 31.4,15.1 31.93,14.57 JP1.14 29.93,10.9 28.4,10.9 27.4,9.9 25.2,9.9 | 25.2,9.9 U$47.P$3 | U$47.P$3 25.1,10 25,10 | 25.2,9.9 U$47.P$3
PTE18
  Top 0.254: U$1.P$33 22.6,40.62 20.5,38.52 20.5,37.6 20.5,23.9 20.6,23.8 29.39,15.01 29.39,14.71 JP1.15 27.39,10.9 25.6,10.9 21.5,10.9 U$46.P$3
PTE19
  Top 0.254: U$1.P$35 21.4,41.12 21.12,41.12 19.9,39.9 19.9,23.4 23.7,19.6 26.85,16.45 26.85,14.6 | JP1.16 26.85,14.6 | U$45.P$3 15.8,10 15.8,11.4 15.8,13.3 17.1,14.6 26.85,14.6
V+  (via drill 0.8 pad 1.93)
  Top 0.254: C1.1 83.55,36.35 84,36.4 84,32.52 83.59,32.11
  Top 1.27: 86,28.56 86,29.7 83.59,32.11 IC1.3 | 86,28.56 86,27.5 84.7,26.2 83.05,26.2 82.1,25.25 82.1,23.3 79.2,20.4 78,19.2 U$12.2 U$10.2 72.5,19.2 | 86,28.56 90.06,28.56 91.15,29.65 91.15,45.65 89.9,46.9 85.15,46.9 83.9,48.15 83.75,48.3 D1.C | 72.5,19.2 U$11.2 69.1,19.2 v61.5,26.8 | D2.C 72.75,18.95 72.5,19.2
  Bottom 1.27: JP5.3 JP5.2 JP5.1 33.81,19.71 36.7,22.6 40.9,26.8 v61.5,26.8

## Text on the board
tPlace: PTC7 | PTC5 | PTC4 | PTA19 | PTA4 | PTA3 | PTA2 | PTA1 | PTA0 | PTC6 | PTA18 | !RESET | RESET | PWR ONLY | POWER | KW2DEV.PCB.v1.0 | VIN | JTAG | R.S. 5/29/2015 | +3.3V | - | + | GND | PTE19 | PTE18 | PTE17 | PTE16 | PTE4 | PTE3 | PTE2 | PTE1 | PTE0 | PTD7 | PTD6 | PTD5 | PTD4 | PTD3 | PTD2 | PTD1 | 4.5V - 15V